# EAGLE board breakout_blue (EAGLE 8.0.2)
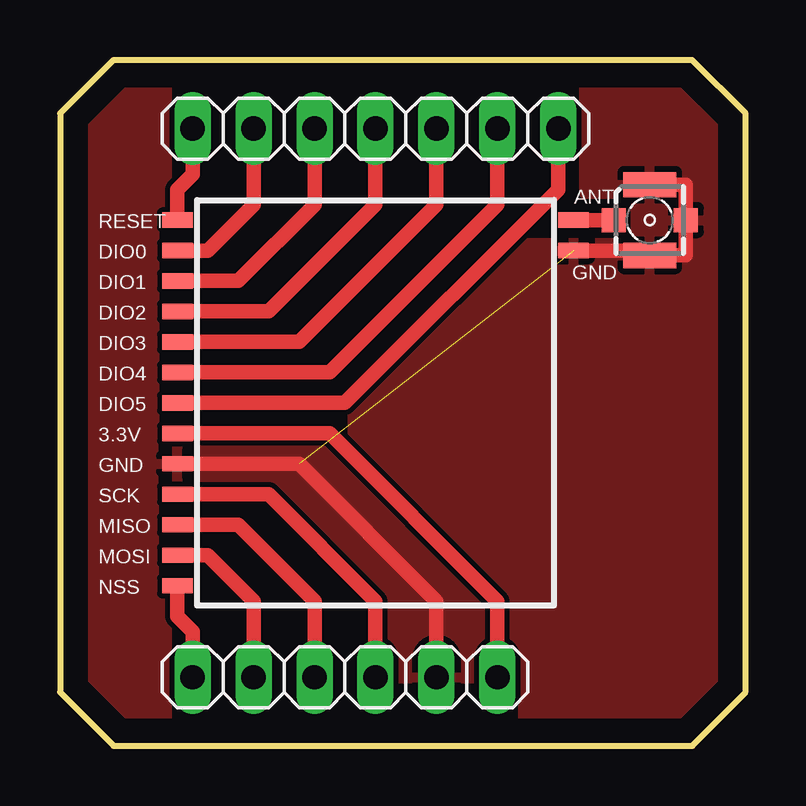
[diagram p0: board, top side]
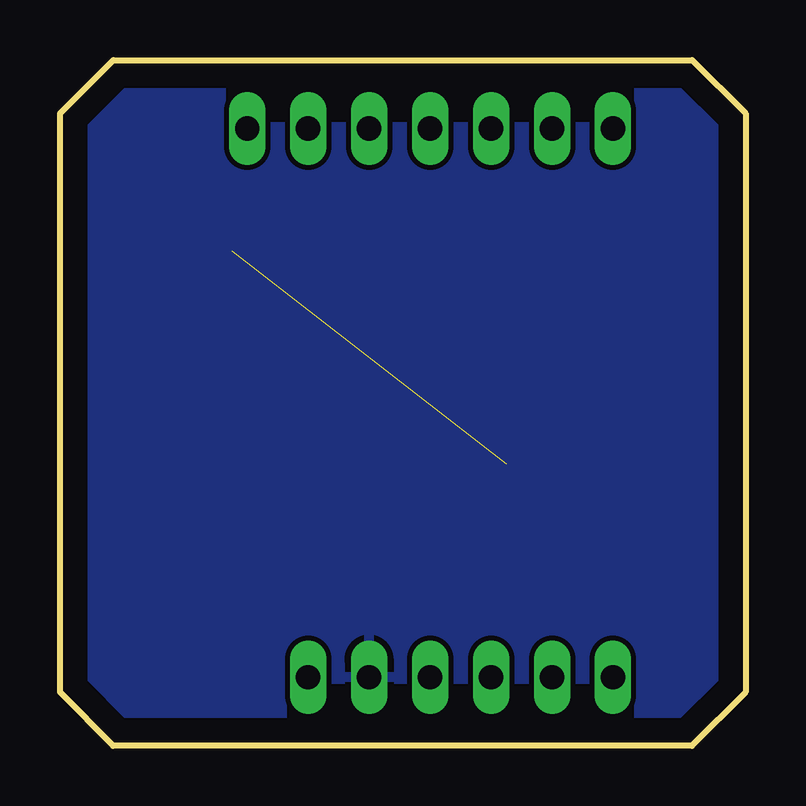
[diagram p1: board, bottom side, seen from below]

Size 28.57 x 28.57 mm. Coordinates in mm from the lower left corner, seen from the top.
Outline: 0,26.35 0,2.23 2.23,0 26.35,0 28.57,2.23 28.57,26.35 26.34,28.57 2.22,28.57 0,26.35
Copper layers (1*16): Top 0.035mm / dielectric 1.5mm / Bottom 0.035mm
Design rules "default": minimum track width 10mil, minimum drill 24mil, track to track 8mil, track to pad 8mil, pad to pad 8mil, via to via 8mil, smd to smd 8mil, copper to edge 40mil, drill to drill 8mil, minimum pad ring 10mil, minimum via ring 8mil, stop-mask expansion 4mil, vias tented up to drill 0mil, thermal gap 10mil

## Footprints (pad centres in the part's own frame; a part is rotated, then mirrored left to right if it is on the bottom)
SMD0,65-1,27 = smd 0.635 x 1.27: 1 0,0
1X07 = drill 1.016 long: 1 -7.62,0; 2 -5.08,0; 3 -2.54,0; 4 0,0; 5 2.54,0; 6 5.08,0; 7 7.62,0
1X06 = drill 1.016 long: 1 -6.35,0; 2 -3.81,0; 3 -1.27,0; 4 1.27,0; 5 3.81,0; 6 6.35,0
734120110 = smd 1 x 1: 1 0,-1.5; S@1 0,1.5 | smd 1.05 x 2.2: S@2 -1.475,0; S@3 1.475,0

## Placement (x,y rotation side)
3.3V  [SMD0,65-1,27]  4.89,13.02 270 top
ANT  [SMD0,65-1,27]  21.4,21.91 270 top
DIO0  [SMD0,65-1,27]  4.89,20.64 270 top
DIO1  [SMD0,65-1,27]  4.89,19.37 270 top
DIO2  [SMD0,65-1,27]  4.89,18.1 270 top
DIO3  [SMD0,65-1,27]  4.89,16.83 270 top
DIO4  [SMD0,65-1,27]  4.89,15.56 270 top
DIO5  [SMD0,65-1,27]  4.89,14.29 270 top
GND  [SMD0,65-1,27]  4.89,11.75 270 top
GND_A  [SMD0,65-1,27]  21.4,20.64 270 top
JP1  [1X07]  13.14,25.72 0 top
JP2  [1X06]  11.87,2.86 180 top
MISO  [SMD0,65-1,27]  4.89,9.21 270 top
MOSI  [SMD0,65-1,27]  4.89,7.94 270 top
NSS  [SMD0,65-1,27]  4.89,6.67 270 top
RESET  [SMD0,65-1,27]  4.89,21.91 270 top
SCK  [SMD0,65-1,27]  4.89,10.48 270 top
X1  734120110  [734120110]  24.57,21.91 270 top

## Library data of the parts
3.3V ANT DIO0 DIO1-DIO5 GND GND_A MISO MOSI NSS RESET SCK = wirepad
JP1 JP2 = pinhead
X1 = con-coax

## Nets
3.3V: 3.3V.1 JP2.1
ANT: ANT.1 X1.1
DIO0: DIO0.1 JP1.2
DIO1: DIO1.1 JP1.3
DIO2: DIO2.1 JP1.4
DIO3: DIO3.1 JP1.5
DIO4: DIO4.1 JP1.6
DIO5: DIO5.1 JP1.7
GND: GND.1 GND_A.1 JP2.2 X1.S@1 X1.S@2 X1.S@3
MISO: JP2.4 MISO.1
MOSI: JP2.5 MOSI.1
NSS: JP2.6 NSS.1
RESET: JP1.1 RESET.1
SCK: JP2.3 SCK.1

## Tracks (layer width: path | path; a pad name or v marks a point on that pad's centre or on a via)
3.3V
  Top 0.61: 3.3V.1 11.24,13.02 18.22,6.03 JP2.1
ANT
  Top 0.61: ANT.1 X1.1
DIO0
  Top 0.61: JP1.2 8.06,22.54 6.16,20.64 DIO0.1
DIO1
  Top 0.61: DIO1.1 7.43,19.37 10.6,22.54 JP1.3
DIO2
  Top 0.61: DIO2.1 8.7,18.1 13.14,22.54 JP1.4
DIO3
  Top 0.61: DIO3.1 9.97,16.83 15.68,22.54 JP1.5
DIO4
  Top 0.61: DIO4.1 11.24,15.56 18.22,22.54 JP1.6
DIO5
  Top 0.61: JP1.7 20.77,23.18 11.87,14.29 DIO5.1
GND  (1 unrouted)
  Top 0.61: GND.1 9.97,11.75 15.68,6.03 JP2.2 | GND_A.1 24.37,20.64 X1.S@3 26.07,20.43 X1.S@1 26.07,23.38 X1.S@2
  pour Top: 1.65,29.46 4.45,29.46 4.45,21.08 6.73,21.08 6.73,12.95 12.19,12.95 12.19,20.95 23.62,20.95 23.62,22.99 21.84,22.99 21.84,29.46 26.8,29.46 29.46,26.8 29.46,1.65 27.18,-1.02 19.3,-1.02 19.3,2.79 7.24,2.79 7.24,5.33 4.45,5.33 4.45,-1.02 2.03,-1.02 -0.89,1.78 -0.89,26.92
  pour Bottom: 1.91,29.08 4.45,29.08 4.45,25.78 21.84,25.78 21.84,29.08 26.54,29.08 29.08,26.54 29.08,1.91 26.67,-0.51 19.3,-0.51 19.3,2.79 4.45,2.79 4.45,-0.51 2.03,-0.51 -0.51,2.03 -0.51,26.67
MISO
  Top 0.61: MISO.1 7.43,9.21 10.6,6.03 JP2.4
MOSI
  Top 0.61: MOSI.1 6.16,7.94 8.06,6.03 JP2.5
NSS
  Top 0.61: NSS.1 4.89,5.4 5.52,4.76 JP2.6
RESET
  Top 0.61: JP1.1 5.52,23.81 4.89,23.18 RESET.1
SCK
  Top 0.61: SCK.1 8.7,10.48 13.14,6.03 JP2.3

## Text on the board
tNames: GND